# EAGLE board orblink (EAGLE 6.4)
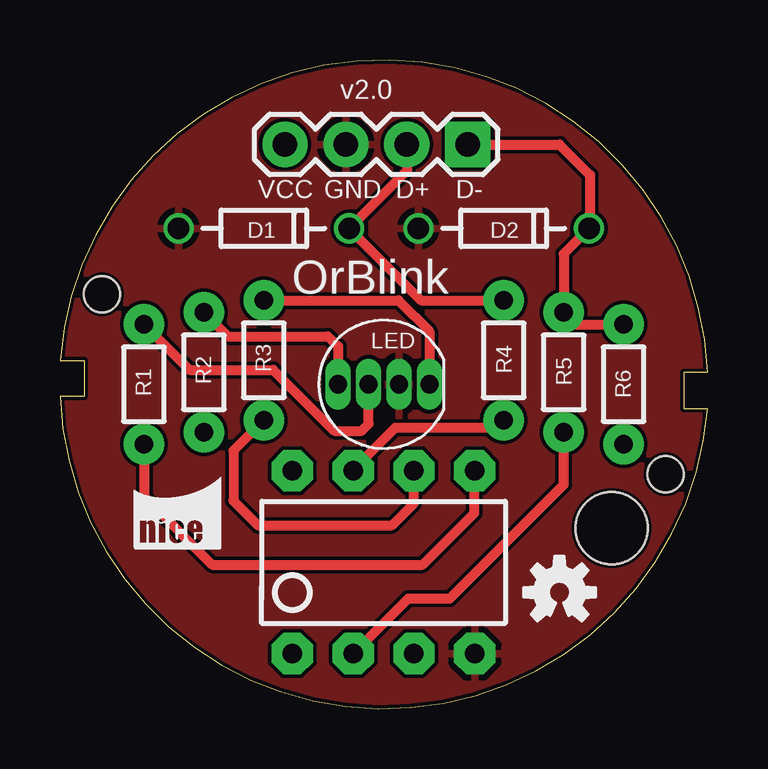
[diagram p0: board, top side]
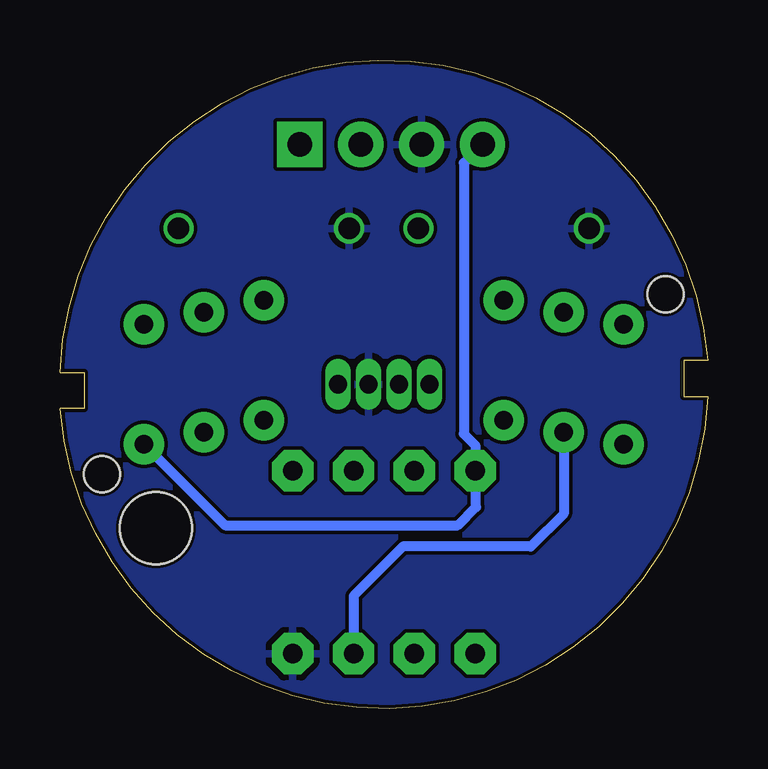
[diagram p1: board, bottom side, seen from below]

Size 27 x 27.04 mm. Coordinates in mm from the lower left corner, seen from the top.
Outline: 0,13.02 arc174 27,12.52 26,12.52 26,14.02 27,14.02 arc174 0,14.52 1,14.52 1,13.02 0,13.02
Copper layers (1*16): Top 0.035mm / dielectric 1.5mm / Bottom 0.035mm
Design rules "hads": minimum track width 6mil, minimum drill 0.3mm, track to track 6mil, track to pad 6mil, pad to pad 8mil, via to via 6mil, smd to smd 6mil, copper to edge 6mil, drill to drill 6mil, minimum pad ring 6mil, minimum via ring 10mil, stop-mask expansion 4mil, vias tented up to drill 25mil, thermal gap 10mil
Holes 1.5 mm at 1.75,17.27 25.25,9.77
Holes 3 mm at 23,7.52

## Footprints (pad centres in the part's own frame; a part is rotated, then mirrored left to right if it is on the bottom)
DIODE-ZENER = drill 0.9: P$1 -3.556,0; P$2 3.556,0
LED-RGB-THRU = drill 0.762 pad 0.889 long: 1 1.905,0; 2 0.635,0; 3 -0.635,0; 4 -1.905,0
1X04 = drill 1.016 pad 1.88 square: 1 0,0 | drill 1.016 pad 1.88: 2 2.54,0; 3 5.08,0; 4 7.62,0
1/6W-RES = drill 0.762 pad 1.676: 1 -2.5,0; 2 2.5,0
DIP08 = drill 0.813 pad 1.727 octagon: 1 -3.81,-3.81; 2 -1.27,-3.81; 3 1.27,-3.81; 4 3.81,-3.81; 5 3.81,3.81; 6 1.27,3.81; 7 -1.27,3.81; 8 -3.81,3.81

## Placement (x,y rotation side)
D1  3.6V  [DIODE-ZENER]  8.5,20.02 180 top
D2  3.6V  [DIODE-ZENER]  18.5,20.02 180 top
D3  LED-RGB-CC-THRUDIFFUSE  [LED-RGB-THRU]  13.5,13.52 0 top
JP1  USB  [1X04]  17,23.52 180 top
LOGO1  OSHW-LOGOS  [OSHW-LOGO-S]  20.83,4.85 0 top
R1  220  [1/6W-RES]  3.5,13.52 90 top
R2  330  [1/6W-RES]  6,14.02 90 top
R3  150  [1/6W-RES]  8.5,14.52 90 top
R4  68  [1/6W-RES]  18.5,14.52 270 top
R5  68  [1/6W-RES]  21,14.02 270 top
R6  1.8k  [1/6W-RES]  23.5,13.52 90 top
U1  ATTINY  [DIP08]  13.49,6.1 0 top
U$1  NICE-LOGO04  [NICE-LOGO-04]  3.81,7.64 0 top

## Library data of the parts
D1 D2 = SparkFun-DiscreteSemi
D3 = SparkFun-LED; PROD_ID: DIO-09434
JP1 = SparkFun-Connectors
LOGO1 = SparkFun-Aesthetics
R1-R6 = SparkFun-Resistors
U1 = SparkFun-DigitalIC; PROD_ID: IC-09445
U$1 = 0_hads

## Nets
BLU: R2.1 U1.3
D+: D1.P$1 JP1.2 R4.1
D-: D2.P$1 JP1.1 R5.1 R6.2
GND: D1.P$2 D2.P$2 D3.2 JP1.3 U1.4
GRN: R1.1 U1.5
N$1: D3.4 R2.2
N$2: D3.3 R1.2
N$3: R4.2 U1.7
N$4: R5.2 U1.2
N$5: D3.1 R3.2
RED: R3.1 U1.6
VCC: JP1.4 R6.1 U1.8

## Tracks (layer width: path | path; a pad name or v marks a point on that pad's centre or on a via)
BLU
  Bottom 0.406: R2.1 6,8.12 7.37,6.75 12.7,6.75 14.76,4.69 U1.3
D+
  Top 0.406: JP1.2 14.46,22.43 D1.P$1 15.06,17.02 R4.1
D-
  Top 0.406: R6.2 21.5,16.02 R5.1 21,18.97 D2.P$1 22.1,20.06 22.1,22.25 20.82,23.52 JP1.1
GND
  pour Top: 4.42,23.64 arc-80 22.4,23.64 arc-95 22.4,3.37 arc-80 4.42,3.37 arc-95
  pour Bottom: 4.42,23.64 arc-80 22.4,23.64 arc-95 22.4,3.37 arc-80 4.42,3.37 arc-95
GRN
  Top 0.406: R1.1 3.5,8.84 6.35,5.99 15.11,5.99 17.27,8.15 17.27,9.88 U1.5
N$1
  Top 0.406: R2.2 7.01,15.52 11.18,15.52 11.6,15.1 D3.4
N$2
  Top 0.406: R1.2 5.4,14.12 8.89,14.12 11.43,11.58 12.57,11.58 12.87,11.87 D3.3
N$3
  Top 0.406: R4.2 18.18,11.71 13.97,11.71 12.22,9.96 U1.7
N$4
  Top 0.406: U1.2 14.52,4.59 16.26,4.59 21,9.34 R5.2
N$5
  Top 0.406: R3.2 14.12,17.02 15.4,15.73 D3.1
RED
  Top 0.406: R3.1 7.24,10.76 7.24,8.66 8.26,7.64 13.84,7.64 14.76,8.56 U1.6
VCC
  Bottom 0.406: R6.1 20.12,7.64 10.41,7.64 9.65,8.4 9.65,9.88 U1.8 9.68,10.97 10.16,11.45 10.16,22.74 JP1.4

## Text on the board
tPlace: v2.0 | OrBlink
tNames: VCC | GND | D+ | D- | LED